# Altium PCB PCB.PcbDoc (part 1 of 3)
Units mm, origin at the board's own origin, x right, y up, seen from the top; angles counter-clockwise.
Board outline 53 x 36 mm, 2 copper layers (Top Layer, Bottom Layer); 30 components, 49 nets, 163 pads, 111 vias.
Unrouted connection lines stored in the file: 1.
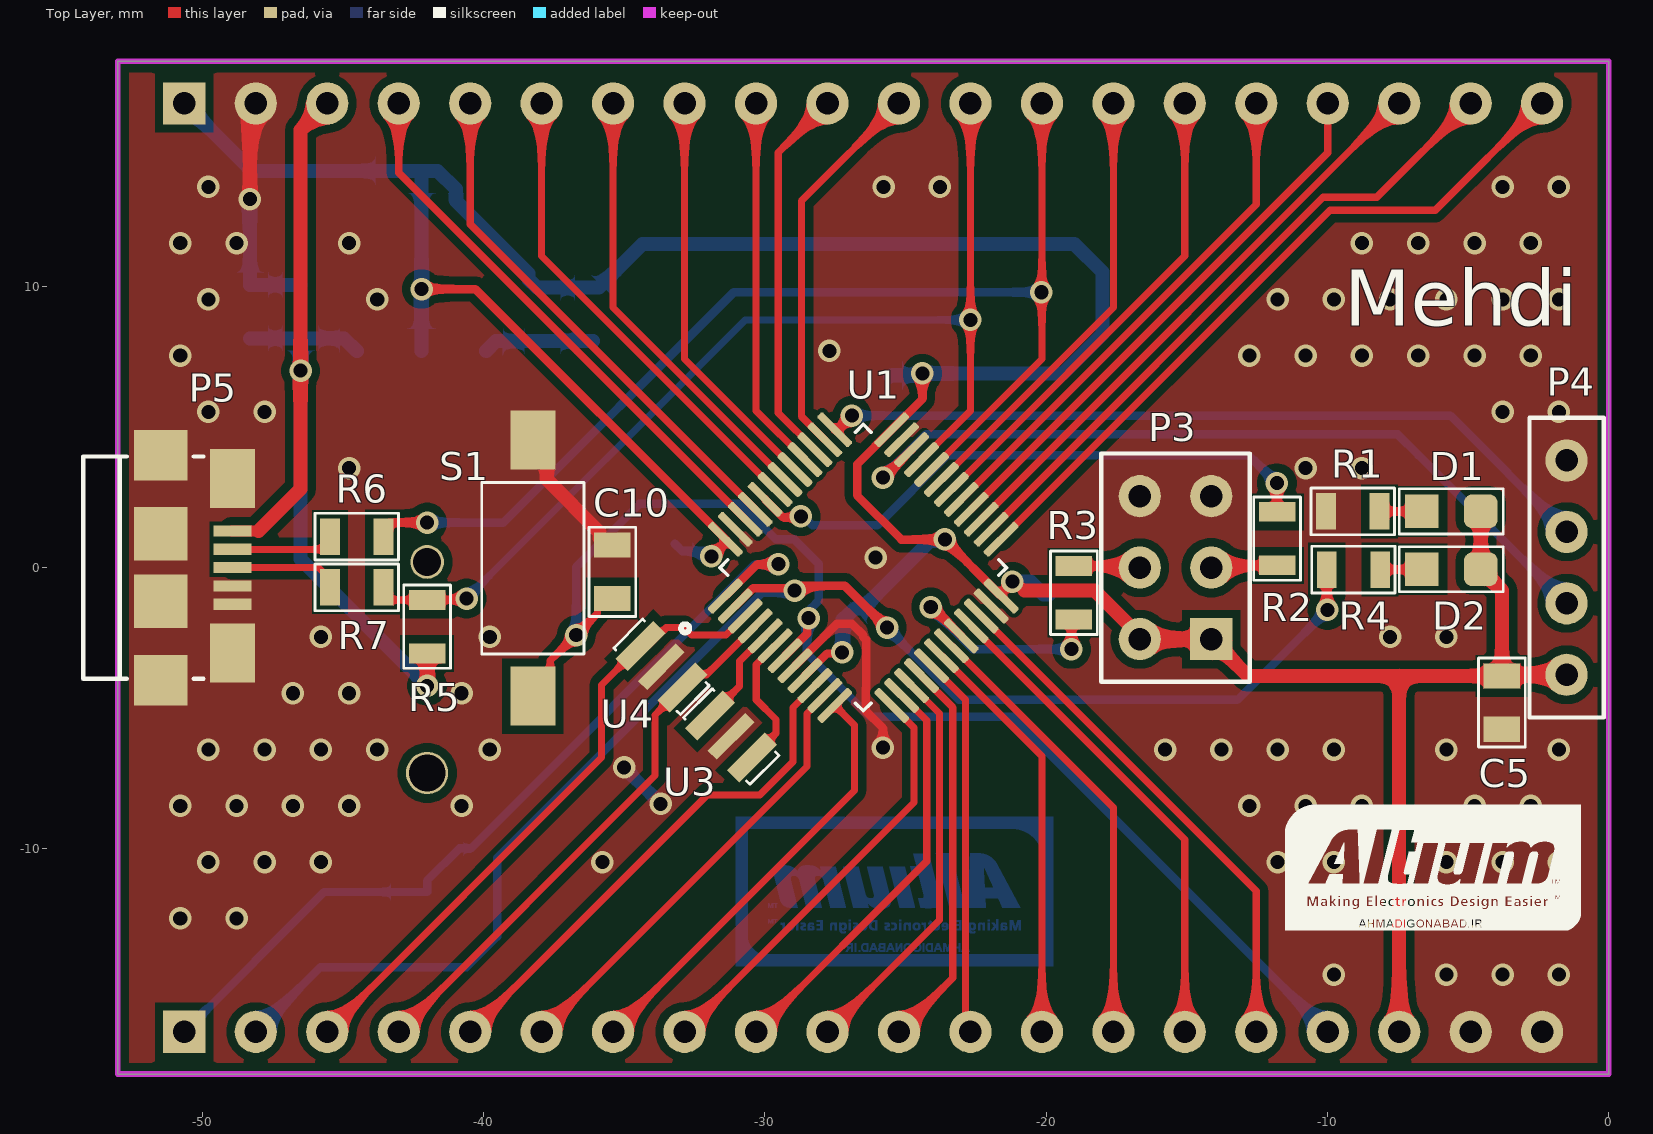
[diagram p0: Top Layer view]
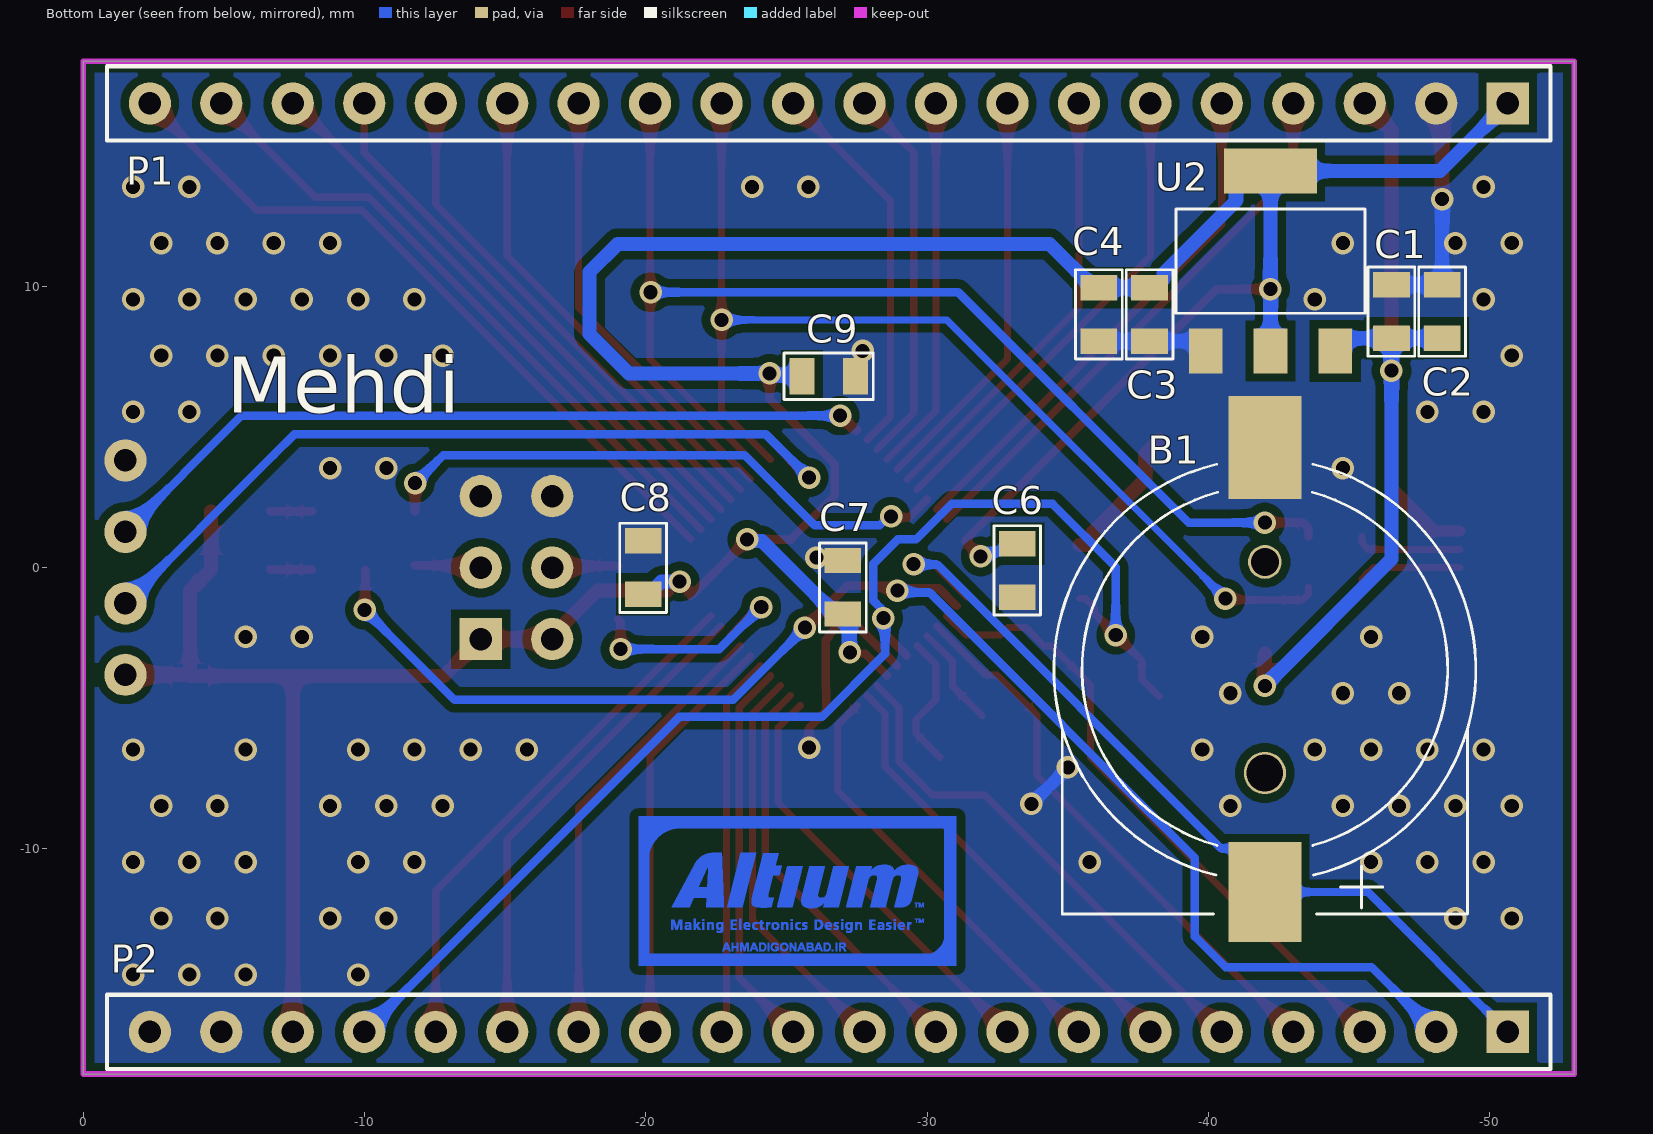
[diagram p1: Bottom Layer view, seen from below]
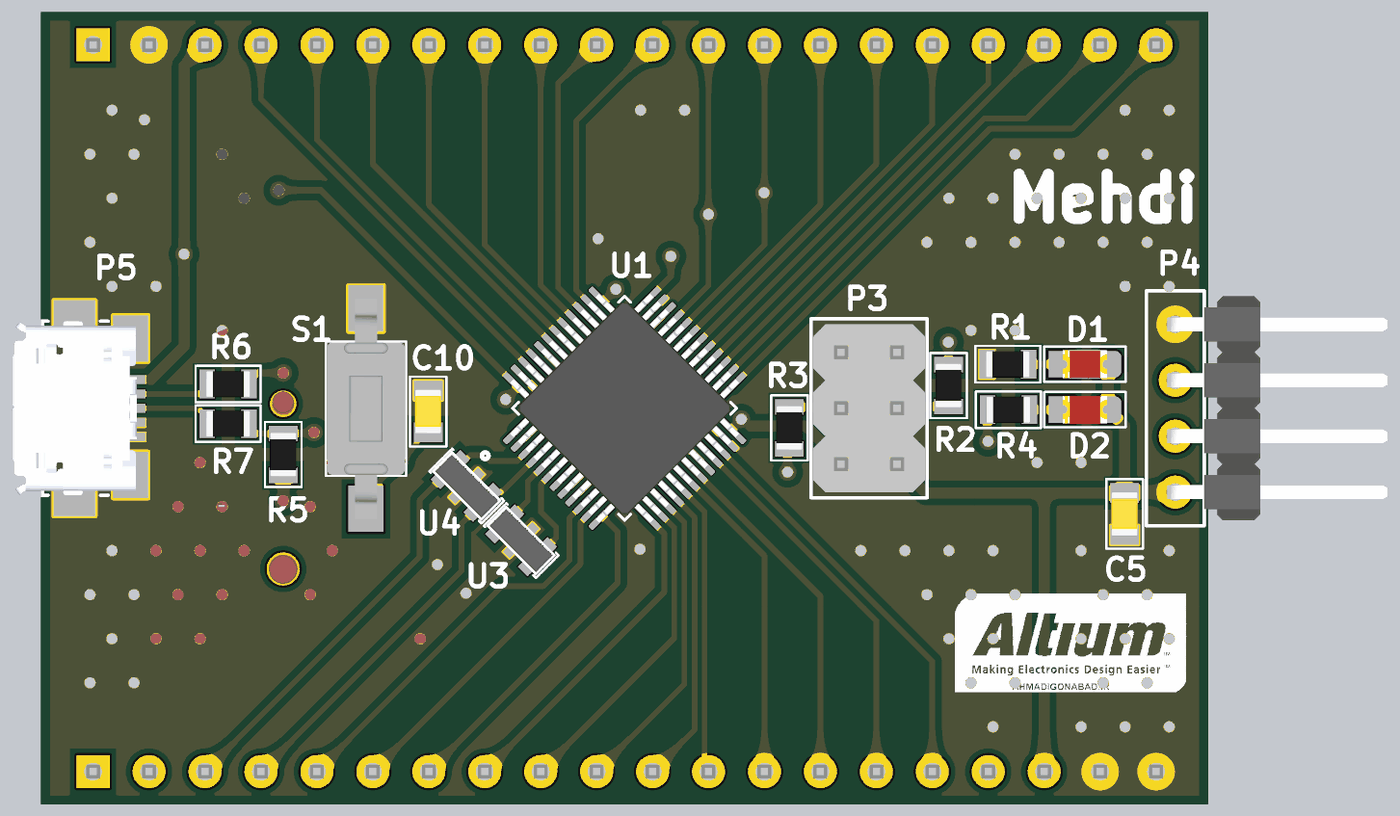
[diagram p4: 3D render of the assembled board from above, using the file's embedded part models]
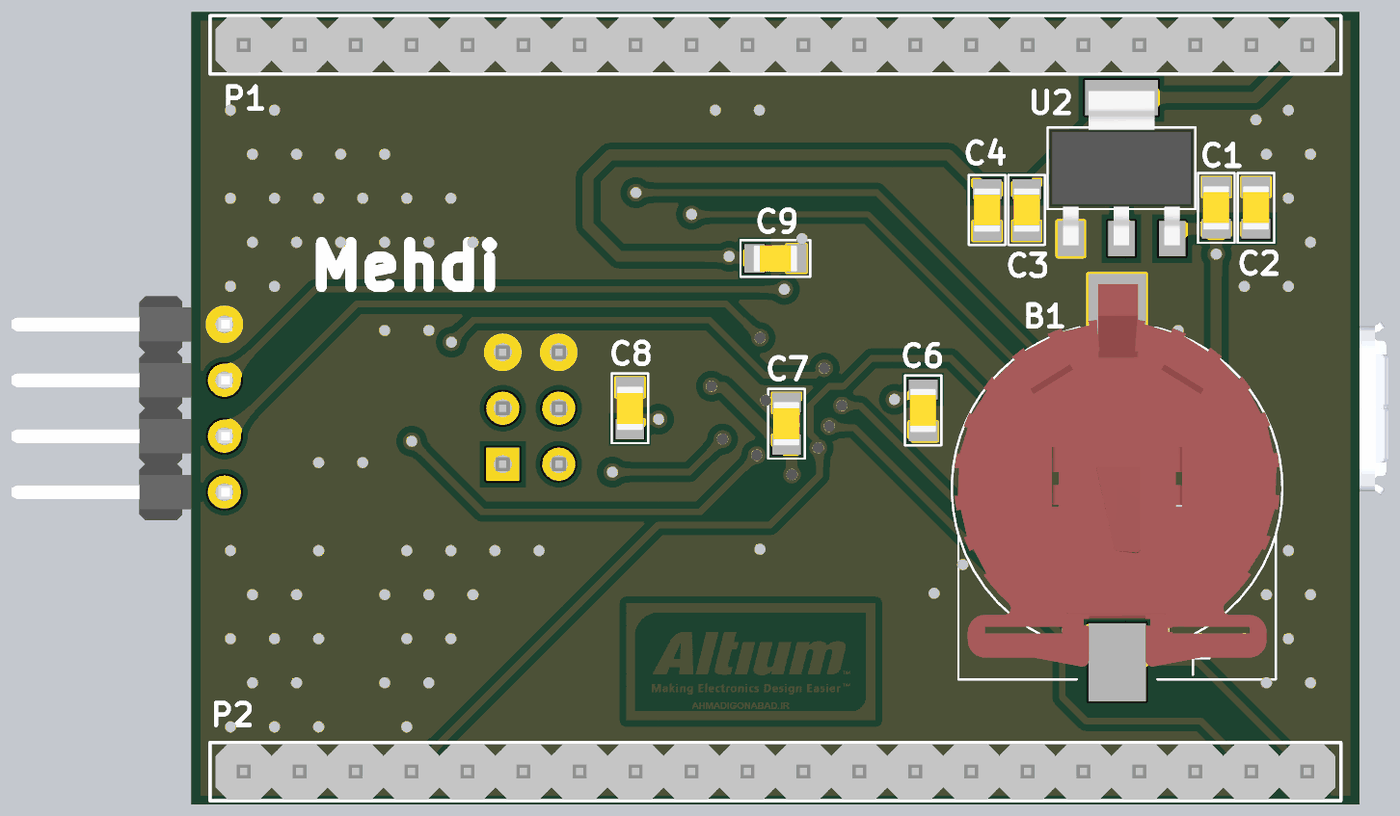
[diagram p5: 3D render of the assembled board from below, using the file's embedded part models]

## Layer stack, top to bottom
Top Solder: solder mask 0.0102, Solder Resist, Dk 3.5
Top Layer: signal copper 0.0356
Dielectric 1: dielectric 0.32, FR-4, Dk 4.8
Bottom Layer: signal copper 0.0356
Bottom Solder: solder mask 0.0102, Solder Resist, Dk 3.5

## Board outline
-53,-18 0,-18 0,18 -53,18

## Design rules (kind name [scope] priority, off if disabled: settings)
Clearance U1&P5 [(InComponent('U1') OR InComponent('P5'))] p1: gap=0.15 ignorepadtopadclearanceinfootprint=FALSE
Clearance [All] p2: gap=0.3 ignorepadtopadclearanceinfootprint=FALSE except(0.2: Arc-Arc Arc-Track Arc-SMDPad Track-Track Track-SMDPad)
HoleToHoleClearance [All] p1: gap=0.3 allowstackedmicrovias=TRUE
MinimumSolderMaskSliver MCU [InComponent('U1')] p1: minsoldermaskwidth=0.1
MinimumSolderMaskSliver [All] p2: minsoldermaskwidth=0.15
PolygonConnect PolygonConnect_2 [All vs IsNamedPolygon('GND_L02_P001')] p1: connectstyle=Direct reliefconductorwidth=0.254 reliefentries=4 polygonreliefangle="90 Angle" airgapwidth=0.254
PolygonConnect PolygonConnect_1 [All vs IsNamedPolygon('GND_L01_P000')] p2: connectstyle=Direct reliefconductorwidth=0.254 reliefentries=4 polygonreliefangle="90 Angle" airgapwidth=0.254
PolygonConnect [All] p3: connectstyle=Relief reliefconductorwidth=0.254 reliefentries=4 polygonreliefangle="90 Angle" airgapwidth=0.254
RoutingVias [All] p1: holewidth=0.5 width=0.8 viastyle="Through Hole" minholewidth=0.5 minwidth=0.8 maxholewidth=0.5 maxwidth=0.8
SilkToSilkClearance [All] p1: silktosilkclearance=0.1
SilkToSolderMaskClearance [IsPad] p1: minsilkscreentomaskgap=0.1 clearancetoexposedcopper=TRUE
SolderMaskExpansion [All] p1: expansion=0.102 istentingtop=FALSE
UnRoutedNet [All] p1: checkbadconnections=TRUE
Width Power [InNet('+*') OR InNet('GND')] p1: maxlimit=1 minlimit=0.3 preferedwidth=0.5
Width signal [All] p2: maxlimit=0.4 minlimit=2539.975 preferedwidth=0.3 toplayer_minwidth=0 bottomlayer_minwidth=0
25 further rules are at their usual default settings.

## Components (designator, comment, footprint, x,y, rotation, side; value= is the part's Value field where it differs from the comment)
B1 "Battery 1220" "Battery 1220" -42,-3.63 r270 bottom
C1 "10uF" C805 -46.5,9.1 r270 bottom
C2 "100nF" C805 -48.3,9.1 r270 bottom
C3 "100nF" C805 -37.9,9 r90 bottom
C4 "22uF" C805 -36.1,9 r90 bottom
C5 "100nF" C805 -3.8,-4.8 r90 top
C6 "100nF" C805 -33.2,-0.1 r90 bottom
C7 "100nF" C805 -27,-0.7 r270 bottom
C8 "100nF" C805 -19.9,0 r270 bottom
C9 "100nF" C805 -26.5,6.8 r0 bottom
C10 "100nF" C805 -35.417,-0.147 r270 top
D1 "LED0805" LED0805 -5.6,2 r180 top
D2 "LED0805" LED0805 -5.6,-0.061 r180 top
P1 "Header 1x20" "Header 1x20" -26.5,16.5 r270 bottom
P2 "Header 1x20" "Header 1x20" -26.5,-16.5 r270 bottom
P3 "Header 2x3" "Header 2x3" -15.4,0 r180 top
P4 "Header 1x4" "Header 1x4" -1.5,0 r0 top
P5 "Micro USB" "Micro USB" -50.2,0 r0 top
R1 "510" R805 -9.1,2 r180 top
R2 "510" R805 -11.79,1.03 r270 top
R3 "510" R805 -19.015,-0.892 r270 top
R4 "510" R805 -9.077,-0.068 r180 top
R5 "510" R805 -42,-2.1 r90 top
R6 "510" R805 -44.5,1.1 r0 top
R7 "510" R805 -44.5,-0.7 r0 top
S1 "Button SMD" "Button SMD" -38.241,-0.02 r270 top
U1 "STM32F103C8T6" QFP50P900X900X160-48N -26.5,0 r45 top
U2 "AMS1117" SOT223 -42.2,10.9 r270 bottom
U3 "Crystal 16MHz" "Crystal 16MHz" -31.2,-6 r135 top
U4 "Crystal 16MHz" "Crystal 16MHz" -33.671,-3.524 r135 top

## Footprints (in the part's own frame and the unit in brackets; to place one, negate y for a bottom-side part, rotate by r counter-clockwise, add the part's x,y. Pads: shape width x height; smd on the part's side, far side on the other; paste and mask are expansions set on the pad)
"Battery 1220" [mm]
  rect 3.66x2.6 smd: 1(-7.9,0)
  rect 3.54x2.6 smd: 2(7.9,0)
  round 1.2 hole 1: ""(-3.83,0)
  round 1.5 hole 1.3: ""(3.67,0)
  silkscreen extent -7.3,-7.5 8.68,7.5, body extent -9.26,-7.37 8.1,7.38, height 4.26
"Button SMD" [mm]
  rect 2.1x1.6 smd: 1(-4.55,0) 2(4.55,0)
  silkscreen extent -3.05,-1.82 3.05,1.82, body extent -5,-1.75 5,1.75, height 5.01
C805 [mm]
  rect 0.9x1.3 smd mask+0.06: 1(-0.95,0) 2(0.95,0)
  silkscreen extent -1.58,-0.83 1.59,0.83, body extent -1,-0.6 1,0.6, height 0.71
"Crystal 16MHz" [mm]
  rect 0.62x1.9 smd mask+0.06: 1(1.05,0) 3(-1.05,0)
  rect 0.45x1.9 smd mask+0.06: 2(0,0)
  silkscreen extent -1.68,-0.72 1.67,0.72, body extent -1.6,-0.66 1.6,0.66, height 0.7
"Header 1x4" [mm]
  round 1.5 hole 0.8: 1(0,3.81) 2(0,1.27) 3(0,-1.27) 4(0,-3.81)
  silkscreen extent -1.32,-5.33 1.32,5.33, body extent -0.37,-5.08 9.65,5.08, height 2.55
"Header 1x20" [mm]
  rect 1.5x1.5 hole 0.8: 1(0,24.13)
  round 1.5 hole 0.8: 2(0,21.59) 3(0,19.05) 4(0,16.51) 5(0,13.97) 6(0,11.43) 7(0,8.89) 8(0,6.35) 9(0,3.81) 10(0,1.27) 11(0,-1.27) 12(0,-3.81) 13(0,-6.35) 14(0,-8.89) 15(0,-11.43) 16(0,-13.97) 17(0,-16.51) 18(0,-19.05) 19(0,-21.59) 20(0,-24.13)
  silkscreen extent -1.32,-25.65 1.32,25.65, body extent -1.27,-25.4 1.27,25.4, height 9.55
"Header 2x3" [mm]
  rect 1.5x1.5 hole 0.8: 1(-1.27,2.54)
  round 1.5 hole 0.8: 2(1.27,2.54) 3(-1.27,0) 4(1.27,0) 5(-1.27,-2.54) 6(1.27,-2.54)
  silkscreen extent -2.64,-4.06 2.64,4.06, body extent -2.54,-3.81 2.54,3.81, height 9.55
LED0805 [mm]
  rrect50% 1.2x1.2 smd: 1(-1.05,0)
  rect 1.2x1.2 smd: 2(1.05,0)
  silkscreen extent -1.85,-0.8 1.85,0.8, body extent -1,-0.62 1,0.63, height 1.11
"Micro USB" [mm]
  rect 1.35x0.4 smd mask+0.05: 1(1.275,1.3) 2(1.275,0.65) 3(1.275,0) 4(1.275,-0.65) 5(1.275,-1.3)
  rect 1.9x1.8 smd: 5(-1.275,-4) 5(-1.275,4)
  rect 1.9x1.9 smd: 5(-1.275,-1.2) 5(-1.275,1.2)
  rect 1.6x2.1 smd: 5(1.275,-3.03) 5(1.275,3.17)
  silkscreen extent -4.02,-3.95 0.26,3.95, body extent -4.11,-3.96 1.56,3.96, height 2.72
QFP50P900X900X160-48N [mm]
  rrect50% 1.56x0.28 smd mask+0.05: 1(-4.18,2.75) 2(-4.18,2.25) 3(-4.18,1.75) 4(-4.18,1.25) 5(-4.18,0.75) 6(-4.18,0.25) 7(-4.18,-0.25) 8(-4.18,-0.75) 9(-4.18,-1.25) 10(-4.18,-1.75) 11(-4.18,-2.25) 12(-4.18,-2.75) 25(4.18,-2.75) 26(4.18,-2.25) 27(4.18,-1.75) 28(4.18,-1.25) 29(4.18,-0.75) 30(4.18,-0.25) 31(4.18,0.25) 32(4.18,0.75) 33(4.18,1.25) 34(4.18,1.75) 35(4.18,2.25) 36(4.18,2.75)
  rrect50% 0.28x1.56 smd mask+0.05: 13(-2.75,-4.18) 14(-2.25,-4.18) 15(-1.75,-4.18) 16(-1.25,-4.18) 17(-0.75,-4.18) 18(-0.25,-4.18) 19(0.25,-4.18) 20(0.75,-4.18) 21(1.25,-4.18) 22(1.75,-4.18) 23(2.25,-4.18) 24(2.75,-4.18) 37(2.75,4.18) 38(2.25,4.18) 39(1.75,4.18) 40(1.25,4.18) 41(0.75,4.18) 42(0.25,4.18) 43(-0.25,4.18) 44(-0.75,4.18) 45(-1.25,4.18) 46(-1.75,4.18) 47(-2.25,4.18) 48(-2.75,4.18)
  silkscreen extent -6.15,-3.6 3.6,3.6, body extent -4.5,-4.5 4.5,4.5, height 1.46
R805 [mm]
  rect 0.7x1.3 smd mask+0.06: 1(-0.95,0) 2(0.95,0)
  silkscreen extent -1.48,-0.83 1.48,0.83, body extent -1,-0.6 1,0.6, height 0.51
SOT223 [mm]
  rect 1.6x1.2 smd: 1(3.2,-2.3) 2(3.2,0) 3(3.2,2.3)
  rect 1.6x3.3 smd: 2(-3.2,0)
  silkscreen extent -1.85,-3.35 1.86,3.35, body extent -3.5,-3.25 3.5,3.25, height 1.64

## Part data
C1 C2 C3 C4 C5 C6 C7 C8 C9 C10: library part C0805
R1 R2 R3 R4 R5 R6 R7: library part R0805
U1: "ARMÂ® CortexÂ®-M3 STM32F1 Microcontroller IC 32-Bit 72MHz 64KB _64K x 8_ FLASH", Package="LQFP-48 STMicroelectronics", Availability=Unavailable, MF=STMicroelectronics, MP=STM32F103C8T6, Price=None, SnapEDA_Link=https://www.snapeda.com/parts/STM32F103C8T6/STMicroelectronics/view-part/52195/?ref=snap

## Via types
v1: diameter 0.8, hole 0.5, Top Layer to Bottom Layer, tented both sides, 111 vias

## Nets (pads, with @x,y where several pads share a name; then routed paths per layer and width w, separated by ;. In a path a pad name is that pad's centre, name@x,y a point inside that pad or via, vN(x,y) a via of type N, cw(c..) or ccw(c..) an arc to the next point about the centre after c; other vN are vias at no path point)
+3V3: C3.2 C4.2 C5.2 C6.2 C7.2 C8.2 C9.2 D1.1 D2.1 P1.1 P2.18 P3.1 P3.2 P4.4 U1.9 U1.24 U1.36 U1.48 U2.2 | length 132
  Top Layer w0.3: v1(-42.2,9.9) -40.289,9.9 U1.48@-31.4,1.011 -31.352,0.963 -31.352,0.948 v1(-31.9,0.4) ; U1.9@-28.572,-3.84 -27.785,-3.053 -27.29,-3.053 v1(-27.25,-3.013) ; v1(-24.4,6.9) -24.4,5.989 U1.36@-25.489,4.9 -26.719,3.67 -26.719,2.568 -25.146,0.995 -23.605,0.995 U1.24@-21.648,-0.963 ; U1.24@-21.6,-1.011 U1.24@-21.648,-0.963 ; -20.774,-0.815 -21.089,-0.5 v1(-21.2,-0.5) -21.648,-0.948 U1.24@-21.648,-0.963 ; P3.2@-16.67,-2.54 P3.2@-16.67,-2.43 ; -7.451,-3.845 -7.45,-3.847 -7.45,-3.85 ; C5.2@-3.8,-3.85 C5.2@-3.76,-3.81
  Top Layer w0.5: -20.774,-0.815 -18.285,-0.815 P3.2@-16.67,-2.43 ; P3.2@-16.67,-2.54 P3.1@-14.13,-2.54 -12.82,-3.85 -7.45,-3.85 ; P2.18@-7.45,-16.5 -7.45,-3.85 ; D1.1@-4.55,2 D2.1@-4.55,-0.061 -3.8,-0.811 C5.2@-3.8,-3.85 -7.45,-3.85 ; C5.2@-3.76,-3.81 P4.4@-1.5,-3.81
  Bottom Layer w0.3: C6.2@-33.2,0.85 -32.938,0.588 -32.223,0.588 -32.035,0.4 v1(-31.9,0.4)
  Bottom Layer w0.5: P1.1@-50.63,16.5 -48.23,14.1 U2.2@-42.2,14.1 ; U2.2@-42.2,7.7 v1(-42.2,9.9) U2.2@-42.2,14.1 ; v1(-27.25,-3.013) -27.231,-2.993 -27.231,-1.85 -27.031,-1.65 C7.2@-27,-1.65 -26.8,-1.45 -26.52,-1.45 -24.127,0.943 -23.657,0.943 v1(-23.6,1) ; C9.2@-25.55,6.8 -25.522,6.828 -24.472,6.828 v1(-24.4,6.9) -19.4,6.9 -18,8.3 -18,10.5 -19,11.5 -34.35,11.5 -35.9,9.95 C3.2@-37.9,9.95 -38.1,9.95 -38.4,10.25 -38.4,10.45 -40.976,13.026 -40.976,13.45 -41.626,14.1 U2.2@-42.2,14.1 ; v1(-21.2,-0.5) -20.55,-0.5 -20.1,-0.95 C8.2@-19.9,-0.95
+5V: C1.2 C2.2 P1.3 P5.1 R5.1 U2.3 | length 36.5
  Top Layer w0.4: P5.1@-48.925,1.3 -48,1.3
  Top Layer w0.5: -48,1.3 -46.5,2.8 v1(-46.5,7) -46.5,15.55 P1.3@-45.55,16.5 ; v1(-42,-4.2) R5.1@-42,-3.05
  Bottom Layer w0.5: C2.2@-48.3,8.15 C1.2@-46.5,8.15 ; U2.3@-44.5,7.7 -44.95,8.15 C1.2@-46.5,8.15 ; v1(-42,-4.2) -46.5,0.3 v1(-46.5,7) C1.2@-46.5,8.15
BOOT0: R2.1 U1.44 | length 21.1
  Top Layer w0.3: U1.44@-29.986,2.425 -29.347,1.786 -28.745,1.786 v1(-28.713,1.817) ; v1(-11.8,3) -11.8,1.99 R2.1@-11.79,1.98
  Bottom Layer w0.3: v1(-28.713,1.817) -28.621,1.817 -28.303,1.5 -26,1.5 -23.5,4 -12.8,4 v1(-11.8,3)
BOOT1: R3.2 U1.20 | length 8.2
  Top Layer w0.3: v1(-24.1,-1.4) -24.039,-1.4 U1.20@-23.014,-2.425 ; v1(-19.1,-2.9) -19.1,-1.926 R3.2@-19.015,-1.842
  Bottom Layer w0.3: v1(-24.1,-1.4) -22.6,-2.9 v1(-19.1,-2.9)
GND: B1.1 C1.1 C2.1 C3.1 C4.1 C5.1 C6.1 C7.1 C8.1 C9.1 C10.1 P1.2 P2.19 P2.20 P3.5 P3.6 P4.1 P5.4 P5.5 R1.2 S1.1 U1.8 U1.23 U1.35 U1.47 U2.1 U3.2 U4.2 | length 26.6
  Top Layer w0.3: U1.8@-28.925,-3.486 -27.439,-2 -26.9,-2 -26.5,-2.4 -26.5,-2.467 -26.4,-2.567 -26.4,-4.284 -26.41,-4.294 -26.41,-5.09 -25.8,-5.7 v1(-25.8,-6.4)
  Top Layer w0.5: v1(-48.3,13.1) -48.3,16.29 P1.2@-48.09,16.5 ; S1.1@-38.241,4.53 -37.744,4.032 -37.744,3.129 -35.867,1.253 -35.867,1.053 -35.617,0.803 C10.1@-35.417,0.803
  Bottom Layer w0.4: v1(-35,-7.1) v1(-33.7,-8.4)
  Bottom Layer w0.5: v1(-48.3,13.1) C2.1@-48.3,10.05 C1.1@-46.5,10.05 ; U2.1@-39.9,7.7 -39.55,8.05 C3.1@-37.9,8.05 C4.1@-36.1,8.05
  other v1: -9.774,-14.466 -5.774,-14.466 -3.774,-14.466 -1.774,-14.466 -50.774,-12.466 -48.774,-12.466 -10.774,-12.466 -8.774,-12.466 -4.774,-12.466 -2.774,-12.466 -49.774,-10.466 -47.774,-10.466 -45.774,-10.466 -35.774,-10.466 -11.774,-10.466 -9.774,-10.466 -5.774,-10.466 -3.774,-10.466 -1.774,-10.466 -50.774,-8.466 -48.774,-8.466 -46.774,-8.466 -44.774,-8.466 -40.774,-8.466 -12.774,-8.466 -10.774,-8.466 -8.774,-8.466 -4.774,-8.466 -2.774,-8.466 -49.774,-6.466 -47.774,-6.466 -45.774,-6.466 -43.774,-6.466 -39.774,-6.466 -15.774,-6.466 -13.774,-6.466 -11.774,-6.466 -9.774,-6.466 -5.774,-6.466 -1.774,-6.466 -46.774,-4.466 -44.774,-4.466 -40.774,-4.466 -45.774,-2.466 -39.774,-2.466 -7.774,-2.466 -5.774,-2.466 -26.057,0.357 -44.774,3.534 -10.774,3.534 -8.774,3.534 -49.774,5.534 -47.774,5.534 -3.774,5.534 -1.774,5.534 -50.774,7.534 -12.774,7.534 -10.774,7.534 -8.774,7.534 -6.774,7.534 -4.774,7.534 -2.774,7.534 -27.7,7.7 -49.774,9.534 -43.774,9.534 -11.774,9.534 -9.774,9.534 -7.774,9.534 -5.774,9.534 -3.774,9.534 -1.774,9.534 -50.774,11.534 -48.774,11.534 -44.774,11.534 -8.774,11.534 -6.774,11.534 -4.774,11.534 -2.774,11.534 -49.774,13.534 -25.774,13.534 -23.774,13.534 -3.774,13.534 -1.774,13.534
NetD1_2: D1.2 R1.1 | length 1.5
  Top Layer w0.3: R1.1@-8.15,2 D1.2@-6.65,2
NetD2_2: D2.2 R4.1 | length 1.5
  Top Layer w0.3: R4.1@-8.127,-0.068 -6.658,-0.068 D2.2@-6.65,-0.061
NetP3_3: P3.3 R2.2 | length 2.4
  Top Layer w0.3: P3.3@-14.13,0 -14.05,0.08 R2.2@-11.79,0.08
NetP3_4: P3.4 R3.1 | length 2.4
  Top Layer w0.3: R3.1@-19.015,0.058 -16.728,0.058 P3.4@-16.67,0
NetP5_2: P5.2 R6.1 | length 3.8
  Top Layer w0.254: P5.2@-48.925,0.65 -45.673,0.65 -45.45,0.873 R6.1@-45.45,1.1
NetP5_3: P5.3 R7.1 | length 3.9
  Top Layer w0.254: P5.3@-48.925,0 -45.858,0 -45.681,-0.177 -45.673,-0.177 -45.45,-0.4 R7.1@-45.45,-0.7
OSC_IN: U1.5 U3.1 | length 3.6
  Top Layer w0.254: U3.1@-31.942,-5.258 -30.9,-4.215 -30.9,-3.329 -29.996,-2.425 U1.5@-29.986,-2.425
OSC_OUT: U1.6 U3.3 | length 4.9
  Top Layer w0.254: U3.3@-30.458,-6.742 -29.603,-5.888 -29.603,-5.393 -30.3,-4.696 -30.3,-3.446 U1.6@-29.632,-2.779
PA0: P2.5 U1.10 | length 18.5
  Top Layer w0.254: P2.5@-40.47,-16.5 -32.047,-8.077 -30.177,-8.077 -29,-6.9 -29,-4.975 U1.10@-28.218,-4.193
PA1: P2.6 U1.11 | length 16.1
  Top Layer w0.254: P2.6@-37.93,-16.5 -28.5,-7.07 -28.5,-5.19 -27.865,-4.555 U1.11@-27.865,-4.547
PA2: P2.7 U1.12 | length 15.4
  Top Layer w0.254: P2.7@-35.39,-16.5 -26.811,-7.921 -26.811,-5.601 U1.12@-27.511,-4.9
PA3: P2.8 U1.13 | length 15.3
  Top Layer w0.254: P2.8@-32.85,-16.5 -24.7,-8.35 -24.7,-5.689 U1.13@-25.489,-4.9
PA4: P2.9 U1.14 | length 14.8
  Top Layer w0.254: P2.9@-30.31,-16.5 -24.244,-10.434 -24.244,-5.438 U1.14@-25.135,-4.547
PA5: P2.10 U1.15 | length 14.4
  Top Layer w0.254: P2.10@-27.77,-16.5 -23.79,-12.52 -23.79,-5.185 U1.15@-24.782,-4.193
PA6: P2.11 U1.16 | length 13.9
  Top Layer w0.254: P2.11@-25.23,-16.5 -23.32,-14.59 -23.32,-4.966 -24.428,-3.858 U1.16@-24.428,-3.84
PA7: P2.12 U1.17 | length 13.6
  Top Layer w0.254: U1.17@-24.075,-3.486 -22.866,-4.695 -22.866,-16.324 P2.12@-22.69,-16.5
PA8: P1.16 U1.29 | length 18.4
  Top Layer w0.254: U1.29@-23.014,2.425 -12.53,12.909 P1.16@-12.53,16.5
PA9: P1.15 U1.30 | length 17.2
  Top Layer w0.254: U1.30@-23.368,2.779 -15.07,11.076 P1.15@-15.07,16.5
PA10: P1.14 U1.31 | length 15.9
  Top Layer w0.254: U1.31@-23.721,3.132 -17.61,9.244 P1.14@-17.61,16.5
PA11: P1.13 R6.2 U1.32 | length 41.8
  Top Layer w0.254: U1.32@-24.075,3.486 -20.15,7.411 -20.15,9.767 v1(-20.17,9.787) -20.15,9.807 P1.13@-20.15,16.5
  Top Layer w0.3: R6.2@-43.55,1.1 -43.55,1.4 -43.35,1.6 v1(-42,1.6)
  Bottom Layer w0.3: v1(-42,1.6) -39.288,1.6 -31.1,9.787 v1(-20.17,9.787)
PA12: P1.12 R5.2 R7.2 U1.33 | length 38.7
  Top Layer w0.254: R7.2@-43.55,-0.7 -43.55,-0.927 -43.327,-1.15 R5.2@-42,-1.15 -40.65,-1.15 v1(-40.6,-1.1) ; U1.33@-24.428,3.84 -22.69,5.578 -22.69,8.801 v1(-22.694,8.804) -22.69,8.808 P1.12@-22.69,16.5
  Bottom Layer w0.254: v1(-40.6,-1.1) -30.696,8.804 v1(-22.694,8.804)
PA15: P1.11 U1.38 | length 13.7
  Top Layer w0.254: U1.38@-27.865,4.547 -28.7,5.382 -28.7,13.03 P1.11@-25.23,16.5
PB0: P2.13 U1.18 | length 14.8
  Top Layer w0.254: U1.18@-23.721,-3.132 -20.15,-6.704 P2.13@-20.15,-16.5
PB1: P2.14 U1.19 | length 16.1
  Top Layer w0.254: U1.19@-23.368,-2.779 -17.61,-8.536 P2.14@-17.61,-16.5
PB3: P1.10 U1.39 | length 13.6
  Top Layer w0.254: U1.39@-28.218,4.193 -29.52,5.495 -29.52,14.75 P1.10@-27.77,16.5
PB4: P1.9 U1.40 | length 13.4
  Top Layer w0.254: P1.9@-30.31,16.5 -30.31,5.578 U1.40@-28.572,3.84
PB5: P1.8 U1.41 | length 14.6
  Top Layer w0.254: P1.8@-32.85,16.5 -32.85,7.411 U1.41@-28.925,3.486
PB6: P1.7 U1.42 | length 15.9
  Top Layer w0.254: P1.7@-35.39,16.5 -35.39,9.244 U1.42@-29.279,3.132
PB7: P1.6 U1.43 | length 17.2
  Top Layer w0.254: P1.6@-37.93,16.5 -37.93,11.076 U1.43@-29.632,2.779
PB8: P1.5 U1.45 | length 18.6
  Top Layer w0.254: P1.5@-40.47,16.5 -40.47,12.202 U1.45@-30.34,2.072
PB9: P1.4 U1.46 | length 19.9
  Top Layer w0.254: P1.4@-43.01,16.5 -43.01,14.035 U1.46@-30.693,1.718
PB10: P2.15 U1.21 | length 17.6
  Top Layer w0.254: U1.21@-22.66,-2.072 -15.07,-9.662 P2.15@-15.07,-16.5
PB11: P2.16 U1.22 | length 18.8
  Top Layer w0.254: U1.22@-22.307,-1.718 -12.53,-11.495 P2.16@-12.53,-16.5
PB12: P1.20 U1.25 | length 25.6
  Top Layer w0.254: U1.25@-21.6,1.011 -9.912,12.699 -6.171,12.699 P1.20@-2.37,16.5
PB13: P1.19 U1.26 | length 23.3
  Top Layer w0.254: U1.26@-21.953,1.365 -10.156,13.162 -8.248,13.162 P1.19@-4.91,16.5
PB14: P1.18 U1.27 | length 21
  Top Layer w0.254: U1.27@-22.307,1.718 -7.525,16.5 P1.18@-7.45,16.5
PB15: P1.17 U1.28 | length 19.7
  Top Layer w0.254: U1.28@-22.66,2.072 -9.99,14.742 P1.17@-9.99,16.5
PC13: P2.2 R4.2 U1.2 | length 53.3
  Top Layer w0.3: U1.2@-31.047,-1.365 -30.408,-0.726 -29.036,-0.726 v1(-28.942,-0.82) ; v1@-29.074,-0.826 -28.803,-0.826 -28.62,-0.644 -27.156,-0.644 -25.668,-2.132 v1(-25.651,-2.132) ; R4.2@-10.027,-0.068 -10.027,-1.473 v1(-10,-1.5)
  Bottom Layer w0.3: P2.2@-48.09,-16.5 -45.79,-14.2 -40.6,-14.2 -39.515,-13.115 -39.515,-10.315 -30.088,-0.888 -29.011,-0.888 v1(-28.942,-0.82) ; v1(-25.651,-2.132) -25.651,-2.15 -23.1,-4.7 -13.2,-4.7 v1(-10,-1.5)
PC14/OSC_IN32: P2.3 U1.3 U4.1 | length 22.7
  Top Layer w0.254: P2.3@-45.55,-16.5 -35.8,-6.75 -35.8,-4.168 U4.1@-34.414,-2.782 -34.155,-2.782 -33.504,-2.131 -32.869,-2.131 -32.6,-2.4 -31.375,-2.4 U1.3@-30.693,-1.718
PC15/OSC_OUT32: P2.4 U1.4 U4.3 | length 19.9
  Top Layer w0.254: P2.4@-43.01,-16.5 -33.9,-7.39 -33.9,-5.238 -32.476,-3.814 -32.082,-3.814 U1.4@-30.34,-2.072
RST: C10.2 P2.17 S1.2 U1.7 | length 46.7
  Top Layer w0.254: S1.2@-38.241,-4.57 -37.625,-3.954 -37.625,-3.305 -35.94,-1.62 -35.94,-1.42 -35.617,-1.097 C10.2@-35.417,-1.097
  Top Layer w0.3: U1.7@-29.279,-3.132 -28.496,-2.349 -28.496,-1.854 v1(-28.44,-1.798)
  Bottom Layer w0.3: v1(-36.7,-2.4) -36.7,0.02 -34.454,2.266 -30.866,2.266 -29.601,1.001 -28.951,1.001 -28.088,0.139 -28.088,-1.178 -28.344,-1.434 -28.344,-1.703 v1(-28.44,-1.798) ; v1@-28.508,-1.798 -28.508,-3.055 -26.259,-5.303 -21.187,-5.303 P2.17@-9.99,-16.5
SWDCLK: P4.2 U1.37 | length 28
  Top Layer w0.3: U1.37@-27.511,4.9 -27.468,4.857 -27.454,4.857 -26.911,5.4 v1(-26.9,5.4)
  Bottom Layer w0.3: v1(-26.9,5.4) -5.63,5.4 P4.2@-1.5,1.27
SWDIO: P4.3 U1.34 | length 28.9
  Top Layer w0.3: v1(-25.8,3.2) -25.775,3.2 U1.34@-24.782,4.193
  Bottom Layer w0.3: v1(-25.8,3.2) -24.261,4.739 -7.509,4.739 -6.77,4 P4.3@-1.5,-1.27
VBAT: B1.2 P2.1 U1.1 | length 30.6
  Top Layer w0.3: U1.1@-31.4,-1.011 -30.278,0.111 -29.528,0.111 v1(-29.515,0.124)
  Bottom Layer w0.3: P2.1@-50.63,-16.5 -45.66,-11.53 B1.2@-42,-11.53 -42,-11.127 -40.85,-9.977 -40.447,-9.977 -30.359,0.111 -29.528,0.111 v1(-29.515,0.124)
pads on no net: B1.
copper on no net: | length 1395.2